# Altium PCB imx6_cpu_board.PcbDoc (part 9 of 9)
Units mil, origin at the board's own origin, x right, y up, seen from the top; angles counter-clockwise.
Board outline 2598.43 x 2362.2 mil, 8 copper layers (Top Layer, GND1, Signal Layer 1, POWER1, POWER2, Signal Layer 2, GND2, Bottom Layer), stack 66.304 mil thick; 354 components, 422 nets, 2180 pads, 1333 vias.
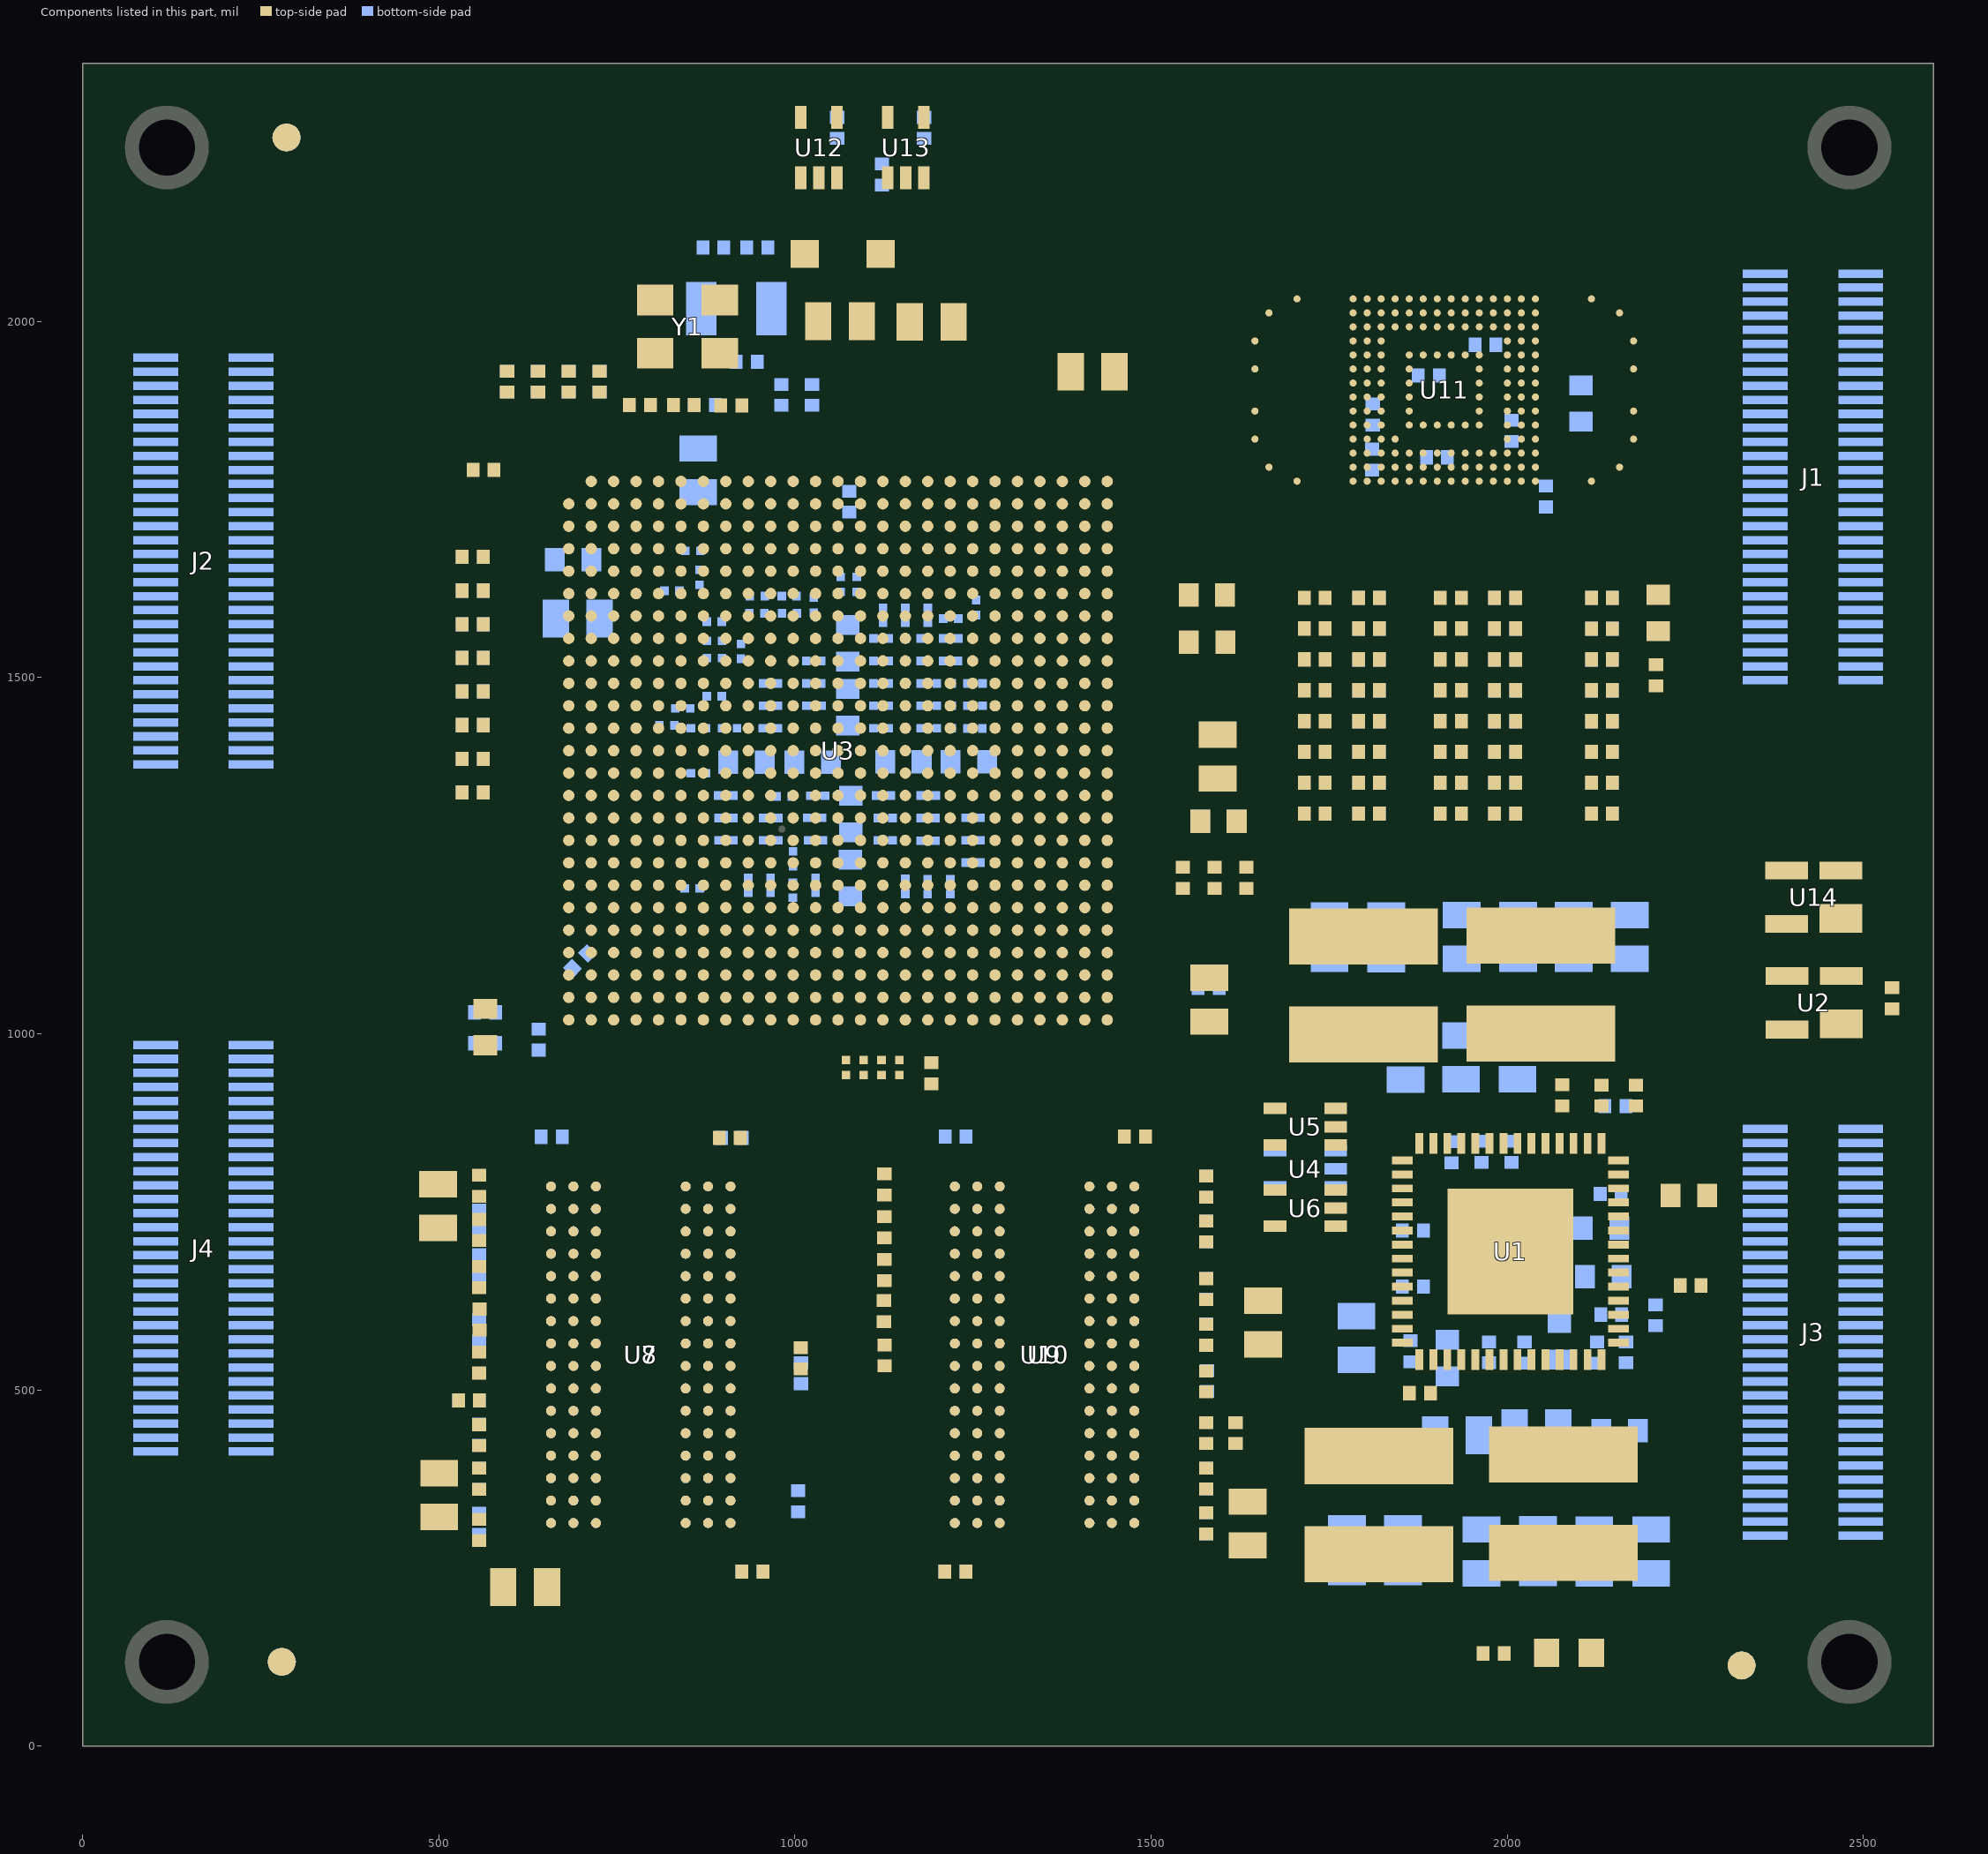
[diagram p15: the components of this part, seen from the top]

## Polygon pours and split planes (outlines as drawn) (continued)
PMIC-VSNVS on POWER2 (split plane): 2558.34,1165.09 2449.98,1165.09 2449.98,1294.77 2488.6,1333.4 2489.71,1335.05 2490.1,1337 2490.1,1429.82 2491.77,1429.96 2495.59,1430.87 2499.23,1432.38 2502.58,1434.44 2505.57,1436.99 2508.13,1439.98 2510.19,1443.34 2511.69,1446.97 2512.61,1450.8 2512.92,1454.72 2512.92,1455.11 2512.61,1459.03 2511.69,1462.86 2510.19,1466.5 2508.13,1469.85 2505.57,1472.84 2502.58,1475.4 2499.23,1477.45 2495.59,1478.96 2491.77,1479.88 2490.1,1480.01 2490.1,2072 2489.71,2073.95 2488.6,2075.6 2480.71,2083.5 2483.92,2082.73 2487.84,2082.42 2491.77,2082.73 2495.59,2083.65 2499.23,2085.15 2502.58,2087.21 2505.57,2089.76 2508.13,2092.76 2510.19,2096.11 2511.69,2099.75 2512.61,2103.57 2512.92,2107.5 2512.92,2107.88 2512.61,2111.81 2511.69,2115.63 2510.19,2119.27 2508.13,2122.62 2505.57,2125.62 2502.58,2128.17 2499.23,2130.23 2495.59,2131.73 2491.77,2132.65 2487.84,2132.96 2483.92,2132.65 2480.09,2131.73 2476.46,2130.23 2473.1,2128.17 2470.11,2125.62 2467.55,2122.62 2465.5,2119.27 2463.99,2115.63 2463.07,2111.81 2462.77,2107.88 2462.77,2107.5 2463.07,2103.57 2463.84,2100.37 2345.6,2218.6 2343.95,2219.71 2342,2220.1 1010,2220.1 1008.05,2219.71 1006.4,2218.6 977.7,2189.91 976.6,2188.26 976.21,2186.31 976.21,2142.83 976.21,1940.11 885.04,1848.94 626.58,1848.94 573.1,1902.42 573.1,2322.12 2558.34,2322.12
P0V75-REFDDR on POWER2 (split plane): 1289.47,1153.99 1291.55,1152.39 1293.28,1151.68 1293.99,1151.38 1296.6,1151.04 1355.48,1151.04 1533.91,972.6 1533.91,794.22 1534.26,791.61 1535.26,789.18 1536.87,787.09 1597.09,726.87 1601.48,722.48 1603.57,720.88 1604.78,720.37 1606,719.87 1608.61,719.53 1639.45,719.53 1823.11,535.87 1825.2,534.26 1827.63,533.26 1830.24,532.91 1896.28,532.91 1935.9,493.29 1935.9,285.16 1744.82,94.09 696.52,94.09 510.09,280.52 510.09,984.93 707.69,1182.54 1260.92,1182.54
GND on POWER2 (split plane): 562.9,1900.31 563.29,1898.36 564.4,1896.71 620.87,1840.24 622.52,1839.13 624.47,1838.74 882.05,1838.74 882.05,1633.56 882.44,1631.61 883.55,1629.96 915.04,1598.47 916.69,1597.36 918.64,1596.98 948.01,1596.98 976.53,1568.46 976.53,1541.18 948.03,1512.68 918.65,1512.68 916.7,1512.29 915.05,1511.19 884.46,1480.6 883.36,1478.95 882.97,1477 882.97,1202.71 703.51,1202.71 700.9,1202.37 699.9,1201.95 698.47,1201.36 696.38,1199.76 492.87,996.24 491.27,994.15 490.26,991.72 489.91,989.11 489.91,276.34 490.26,273.73 491.27,271.3 492.87,269.21 685.21,76.87 687.3,75.26 689.73,74.26 692.34,73.91 1749,73.91 1751.61,74.26 1754.04,75.26 1756.13,76.87 1953.12,273.85 1954.72,275.94 1955.43,277.66 1955.73,278.37 1956.07,280.98 1956.07,456.91 2153.66,456.91 2156.27,457.26 2158.7,458.26 2160.79,459.87 2264.13,563.21 2265.74,565.3 2266.74,567.73 2267.09,570.34 2267.09,735.82 2305.18,773.91 2365,773.91 2367.61,774.26 2370.04,775.26 2372.13,776.87 2390.18,794.91 2415.82,794.91 2430.78,779.96 2432.87,778.36 2433.58,778.06 2435.3,777.35 2437.91,777 2502.09,777 2504.7,777.35 2507.13,778.36 2509.22,779.96 2528.18,798.91 2558.34,798.91 2558.34,40.09 40.09,40.09 40.09,2322.12 562.9,2322.12
GND on GND2 (split plane): 2578.33,20.1 20.1,20.1 20.1,2342.11 2578.33,2342.11

## Keep-outs
Keep-Out Layer:
  the board outline again, w5.91

## Other copper
Top Layer:
  pour cut-out: 640.55,1817.82 1480.68,1817.82 1480.77,1817.73 1480.77,976.95 639.99,976.95
  pour cut-out: 1783.47,2031.49 2039.37,2031.49 2039.37,1775.59 1783.47,1775.59
Bottom Layer:
  pour cut-out: 2094.46,1652 2118.11,1628.35 2118.11,1302.11 2112,1296 2054.73,1296 2045.28,1305.46 2045.28,1621.97 2034.87,1632.38 2034.87,1648.91 2037.96,1652
  pour cut-out: 1516,1740.71 1727.39,1740.71 1777.9,1690.19 1939.29,1690.19 2001,1628.48 2001,1290 1955.3,1244.3 1464.92,1244.3 1427,1282.22 1254.78,1110 634.7,1110 609.38,1135.32 609.38,1511.38 624,1526 762.02,1526 940,1703.98 940,1853.93 986.98,1900.91 1060.91,1900.91 1181.29,2021.29 1460.71,2021.29 1509,1973 1498.95,1962.95 1498.95,1816.39
  pour cut-out: 952,2164 1083,2164 1152,2095 1152,1930.95 1101.05,1880 953,1880 937.6,1895.4 937.6,2162.74 945.7,2170.84
  pour cut-out: 2528,652.11 2577.45,652.11 2583,657.66 2583,1002.22 2555,1030.22 2555,1110 2539,1126 2417.91,1126 2383.91,1092 2383.91,886.09 2435,835 2435,710.67 2496.06,649.61
GND1 (plane layer: these items are gaps in the copper):
  lines w50: 228,372.09 228,372.48 ; 228,1026.05 228,1026.44 ; 228,1336.61 228,1337 ; 228,1989.39 228,1989.77 ; 2487.84,253.94 2487.84,254.32 ; 2487.84,906.32 2487.84,906.71 ; 2487.84,1454.72 2487.84,1455.11 ; 2487.84,2107.11 2487.84,2107.5
POWER1 (plane layer: these items are gaps in the copper):
  lines w10: 950.14,1255.61 950.14,1401.86 950.14,1413.09 950.14,1507.58 ; 989.55,1549.02 927.57,1611 ; 1031,1587 1064,1554 1064,1404.28 1064,1255 ; 1063,2165.6 1063,2132 1063,2053 ; 927.57,1611 855.65,1682.93 855.65,1728.04 1063,1935.39 1063,2053 ; 927.57,1611 937.57,1621 1076.13,1759.56 1076.13,1810.13 1188,1922 1188,2053 1182,2059 1132,2059 1069,2059 1063,2053 ; 950.14,1507.58 918.65,1507.58 870.28,1555.95 806,1555.95 729.67,1632.28 729.67,1633.56 729.67,1871.38 913.4,2055.12 913.4,2128.87 951.13,2166.6 1028.4,2166.6 1229.4,2166.6 1289.47,2106.53 1289.47,1846.91 1064,1621.45 996.55,1554 967,1524.45 950.14,1507.58
  lines w20: 1826.35,547 2166,547 2241,472 2241,-65 1546.6,-65 500,-65 500,637.61 475,662.61 475,843.39 475,964.11 703.51,1192.62 855.66,1192.62 918.65,1255.61 1145,1255.61 1207.99,1318.6 1226.39,1337 1246.7,1337 1265.09,1318.6 1296.6,1287.1 1296.6,1192.62 ; 1863,547 1797,547 1796,548 1618.38,725.62 1618.38,754.98 1618.38,1065.51 1621,1068.13 1588.13,1101 1496.52,1192.61 1296.61,1192.61 ; 1296.6,1192.62 1296.61,1192.61
  lines w50: 228,372.09 228,372.48 ; 228,1026.05 228,1026.44 ; 228,1336.61 228,1337 ; 228,1989 228,1989.39 ; 2487.84,253.94 2487.84,254.32 ; 2487.84,906.32 2487.84,906.71 ; 2487.84,1454.72 2487.84,1455.11 ; 2487.84,2107.11 2487.84,2107.5
  lines w120: 118.11,118.11 118.11,118.11 ; 118.11,2244.09 118.11,2244.09 ; 2480.31,118.11 2480.32,118.11 ; 2480.31,2244.09 2480.32,2244.09
POWER2 (plane layer: these items are gaps in the copper):
  lines w10: 568,2362.2 568,1900.31 624.47,1843.84 887.15,1843.84 ; 888.07,1193.54 888.07,1477 918.65,1507.58 950.14,1507.58 981.63,1539.07 981.63,1570.57 950.12,1602.07 918.64,1602.07 887.15,1633.56 887.15,1843.84 ; 1139.12,1192.62 1139.12,1527.43 ; 1139.12,1507.58 1139.12,1527.43 ; 1265.11,1570.56 1182.25,1570.56 ; 1912.24,1156 1912.24,1538.95 1880.63,1570.56 1182.25,1570.56 ; 2310,1159 2310,1910.47 2282.47,1938 981.31,1938 ; 2444.88,1155.12 2444.88,1296.88 2485,1337 2485,2072 2342,2215 1010,2215 981.31,2186.31 981.31,2142.83 981.31,1938 ; 887.15,1843.84 981.31,1938 ; 1139.12,1527.43 1182.25,1570.56
  lines w20: 1422.58,1098.2 1479.37,1155 2593,1155 ; 1948,467 2153.66,467 2257,570.34 2257,740 2301,784 2365,784 2386,805 2420,805 2437.91,787.09 2502.09,787.09 2524,809 2607,809 ; 500,276.34 500,989.11 703.51,1192.62 824.16,1192.62 1265.1,1192.62 1296.6,1161.12 1359.66,1161.12 1544,976.78 1544,794.22 1604.22,734 1608.61,729.61 1643.63,729.61 1830.24,543 1900.45,543 1945.98,497.47 1945.98,280.98 1749,84 692.34,84 500,276.34
  lines w50: 228,372.48 228,372.87 ; 228,1026.05 228,1026.44 ; 228,1337 228,1337.39 ; 228,1989 228,1989.39 ; 2487.84,253.94 2487.84,254.32 ; 2487.84,906.71 2487.84,907.1 ; 2487.84,1454.72 2487.84,1455.11 ; 2487.84,2107.5 2487.84,2107.88
  lines w120: 118.11,118.11 118.11,118.11 ; 118.11,2244.09 118.11,2244.09 ; 2480.32,118.11 2480.32,118.11 ; 2480.32,2244.09 2480.32,2244.09
GND2 (plane layer: these items are gaps in the copper):
  lines w50: 228,372.09 228,372.48 ; 228,1026.05 228,1026.44 ; 228,1336.61 228,1337 ; 228,1989 228,1989.39 ; 2487.84,253.94 2487.84,254.32 ; 2487.84,907.1 2487.84,907.48 ; 2487.84,1454.72 2487.84,1455.11 ; 2487.84,2107.11 2487.84,2107.5
Multi-Layer:
  pour cut-out: 818.33,273.39 818.33,107.39 749.33,107.39 749.33,271.39 591.33,271.39 583.33,279.39 583.33,804.39 605.33,826.39 959.33,826.39 959.38,826.34 1546.38,826.34 1550.38,822.34 1550.38,277.34 1540.38,267.34 1385.38,267.34 1385.38,112.34 1310.38,112.34 1310.38,267.34 1110.38,267.34 1105.38,262.34 1105.38,112.34 1025.38,112.34 1025.38,267.34 1020.38,272.34 973.28,272.34 972.33,271.39 820.33,271.39

## Silkscreen, mask and mechanical layers (free items; w line width, h text height)
Top Overlay:
  text "IMX6Q-CORE-T1-R1" at 1357.02,2272 h40
Mechanical 9:
  text "DDR3" at 1443.58,6565.35 h60
  text "DDR3" at 1423.58,6005.35 h60
  text "DDR3" at 3199.48,5252.87 h60
  text "JTAG" at 2692.48,5202.87 h100 r270
  text "MX6" at 3969.98,4959.53 h100
  text "DDR3" at 3179.48,4692.87 h60
  text "DDR3" at 57.75,4311.93 h60
  text "MX6" at 828.25,4018.59 h100
  text "DDR3" at 37.75,3751.93 h60
Mechanical 16:
  text "cap??" at 2526.58,6100.35 h10
  text "cap??" at 4282.48,4787.87 h10
  text "cap??" at 1140.75,3846.93 h10
Mechanical 30:
  lines w4: 1690,1310 1690,1280 1700,1280 1840,1280 1850,1280 1850,1310 ; 1760,1280 1760,1260 1780,1240 2180,1240 2230,1190 2230,1000 2360,870 ; 1880,1310 1880,1280 2040,1280 2040,1310 ; 1960,1280 1960,1270 1970,1260 2420,1260 2430,1270 2430,1690 ; 2360,870 2350,860 2350,540 2370,520 2550,520 2560,530 2560,860 2550,870 2420,870 2360,870 ; 2290,1720 2320,1690 2500,1690 2510,1700 2510,2030 2500,2040 2310,2040 2290,2020 2290,1720

## Text inside footprints (layer, text, board x,y; h text height)
U3: Mechanical 30 "25" at 1430,1840 h30; Mechanical 30 "1" at 688,1832 h30; Mechanical 30 "A" at 604,1762 h30; Mechanical 30 "AE" at 670,920 h30
U7: Mechanical 31 "1" at 957,850 h30; Mechanical 31 "A" at 991.38,774 h30
U8: Mechanical 30 "1" at 685.68,839.33 h30 r90; Mechanical 30 "A" at 618.81,802.46 h30 r90
U9: Mechanical 31 "1" at 1473,856 h30; Mechanical 31 "A" at 1548,776 h30
U10: Mechanical 30 "1" at 1252.61,839.33 h30 r90; Mechanical 30 "A" at 1185.74,802.46 h30 r90
U11: Mechanical 30 "14" at 1524,2093 h30; Mechanical 30 "1" at 1554,1700 h30; Mechanical 30 "A" at 1643,1621 h30; Mechanical 30 "AH" at 2258,1668 h30